# EAGLE board board comp2 2-27-12 (EAGLE 6.3)
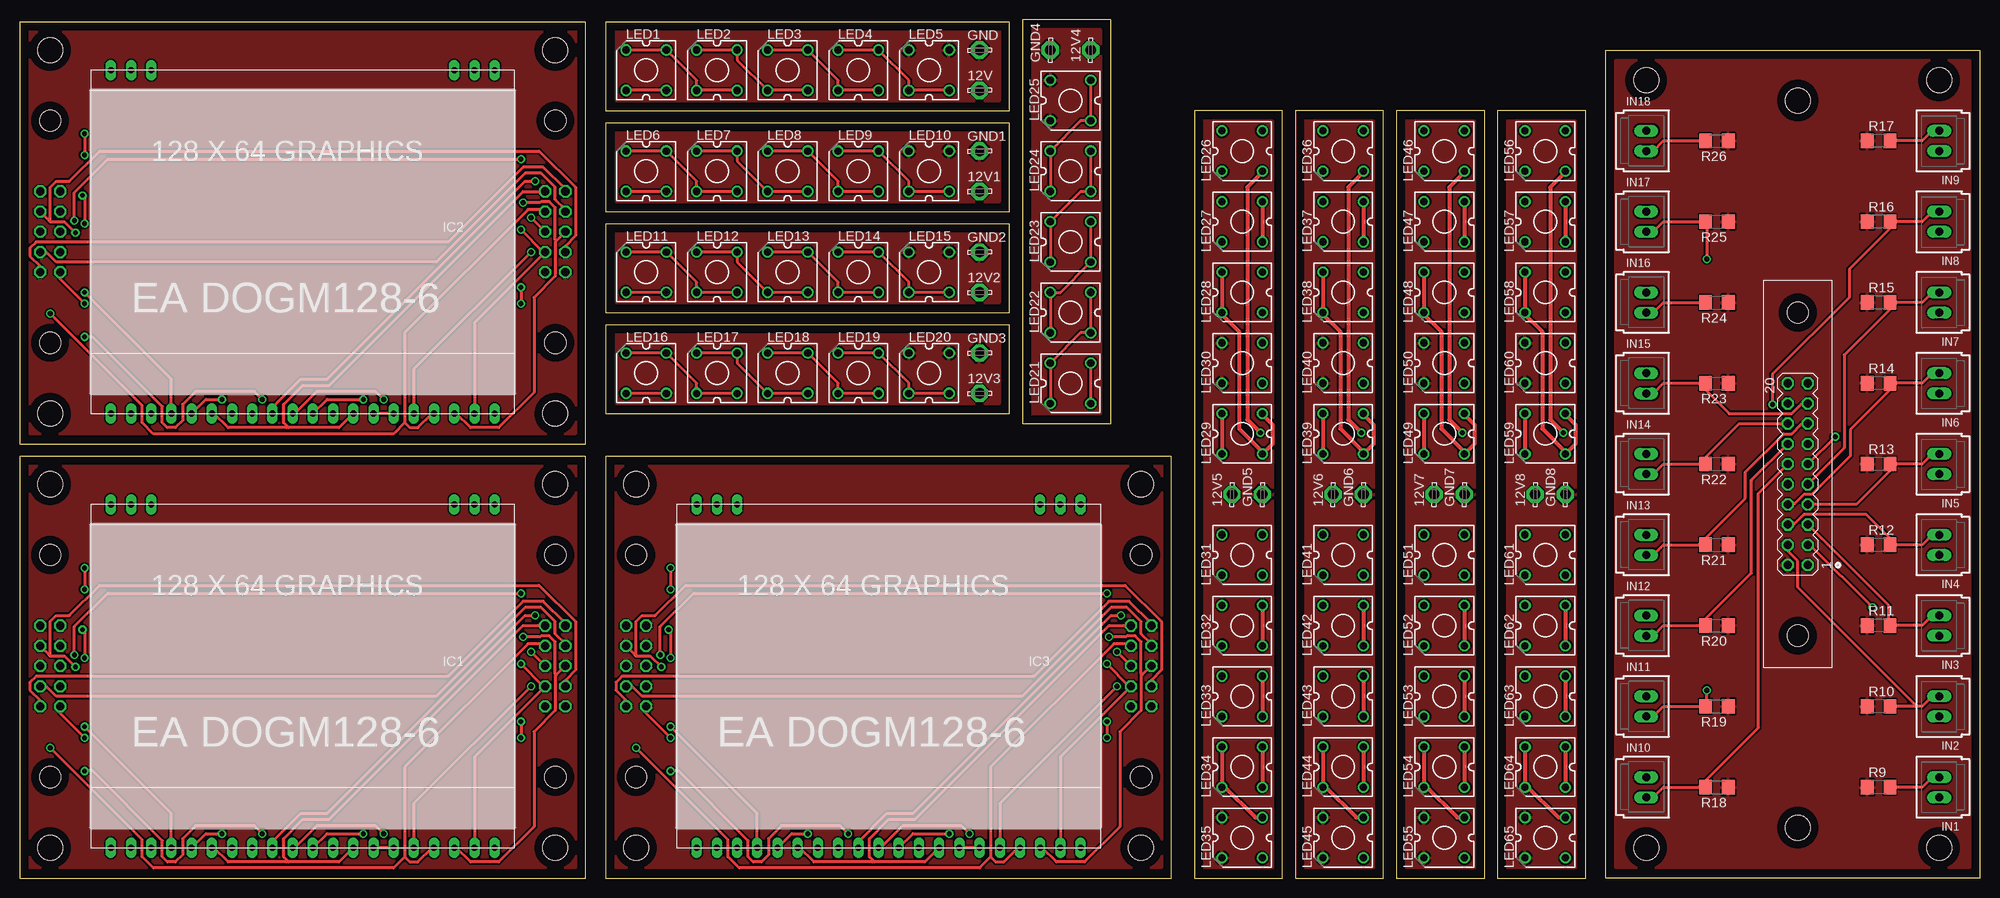
[diagram p0: board, top side]
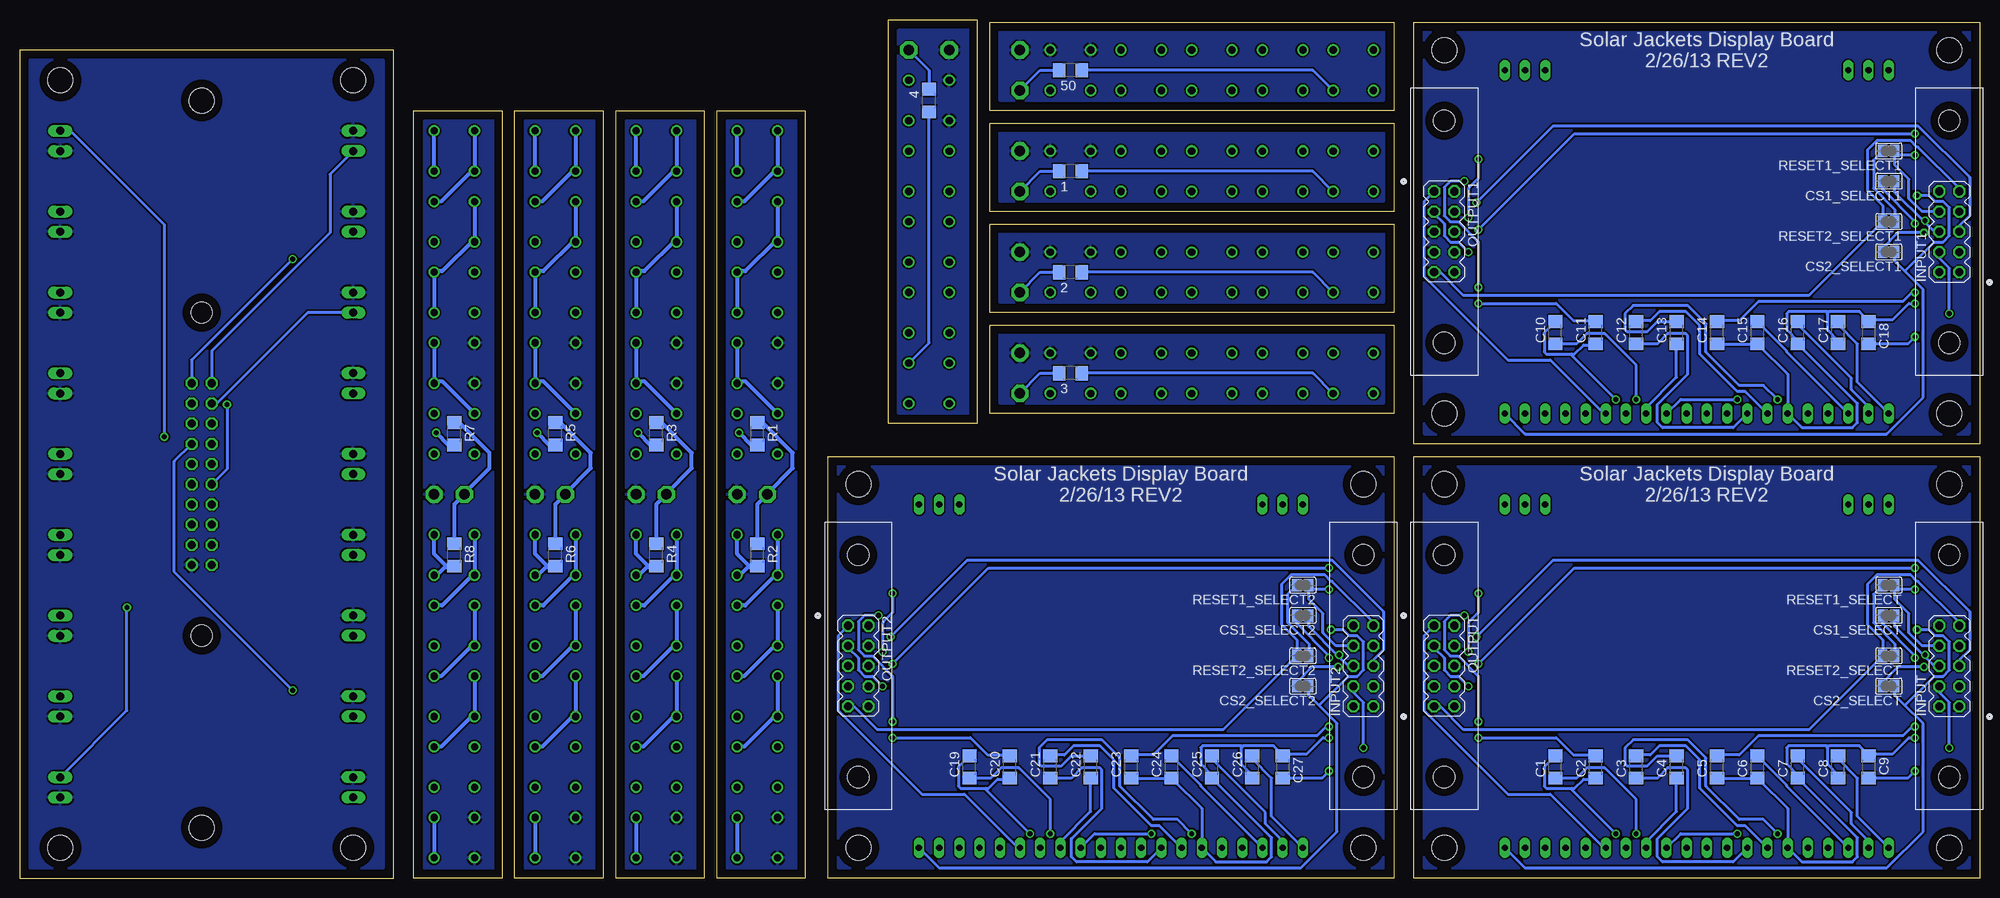
[diagram p1: board, bottom side, seen from below]

Size 246.38 x 107.93 mm. Coordinates in mm from the lower left corner, seen from the top.
Outline: 0,0 71.1,0 71.1,53.01 0,53.01 0,0
Outline: 0,54.61 71.1,54.61 71.1,107.62 0,107.62 0,54.61
Outline: 73.66,0 144.76,0 144.76,53.01 73.66,53.01 73.66,0
Outline: 73.66,96.52 124.44,96.52 124.44,107.62 73.66,107.62 73.66,96.52
Outline: 73.66,83.82 124.44,83.82 124.44,94.92 73.66,94.92 73.66,83.82
Outline: 73.66,71.12 124.44,71.12 124.44,82.22 73.66,82.22 73.66,71.12
Outline: 73.66,58.42 124.44,58.42 124.44,69.52 73.66,69.52 73.66,58.42
Outline: 137.16,57.15 137.16,107.93 126.06,107.93 126.06,57.15 137.16,57.15
Outline: 158.75,0 158.75,96.5 147.65,96.5 147.65,0 158.75,0
Outline: 171.45,0 171.45,96.5 160.35,96.5 160.35,0 171.45,0
Outline: 184.15,0 184.15,96.5 173.05,96.5 173.05,0 184.15,0
Outline: 196.85,0 196.85,96.5 185.75,96.5 185.75,0 196.85,0
Outline: 246.38,104.14 246.38,0 199.39,0 199.39,104.14 246.38,104.14
Copper layers (1*16): Top 0.035mm / dielectric 1.5mm / Bottom 0.035mm
Design rules "default": minimum track width 10mil, minimum drill 24mil, track to track 8mil, track to pad 8mil, pad to pad 8mil, via to via 8mil, smd to smd 8mil, copper to edge 40mil, drill to drill 8mil, minimum pad ring 10mil, minimum via ring 8mil, stop-mask expansion 4mil, vias tented up to drill 0mil, thermal gap 10mil
Holes 3.17 mm at 3.81,3.81 67.31,3.81 67.31,49.53 3.81,49.53 3.81,58.42 67.31,58.42 67.31,104.14 3.81,104.14 77.47,3.81 140.97,3.81 140.97,49.53 77.47,49.53 241.3,100.33 204.47,100.33 241.3,3.81 204.47,3.81 223.52,6.35 223.52,97.79
vRestrict: area 8.9,6.3 to 62.2,44.5; area 8.9,61 to 62.2,99.1; area 82.5,6.3 to 135.9,44.5

## Footprints (pad centres in the part's own frame; a part is rotated, then mirrored left to right if it is on the bottom)
R1206 = smd 1.6 x 1.803: 1 -1.422,0; 2 1.422,0
LSP13 = drill 1.321 pad 2.159 octagon: MP 0,0
C1206 = smd 1.6 x 1.8: 1 -1.4,0; 2 1.4,0
SJ = smd 1.168 x 1.6: 1 -0.762,0; 2 0.762,0
EADOGM128 = drill 0.8 long: 1 -25.4,-21.59; 2 -22.86,-21.59; 3 -20.32,-21.59; 18 17.78,-21.59; 19 20.32,-21.59; 20 22.86,-21.59; 21 22.86,21.59; 22 20.32,21.59; 23 17.78,21.59; 24 15.24,21.59; 25 12.7,21.59; 26 10.16,21.59; 27 7.62,21.59; 28 5.08,21.59; 29 2.54,21.59; 30 0,21.59; 31 -2.54,21.59; 32 -5.08,21.59; 33 -7.62,21.59; 34 -10.16,21.59; 35 -12.7,21.59; 36 -15.24,21.59; 37 -17.78,21.59; 38 -20.32,21.59; 39 -22.86,21.59; 40 -25.4,21.59
70543-02 = drill 1.016 long: 1 -1.27,0; 2 1.27,0
MA05-2 = drill 1.016 octagon: 1 -5.08,-1.27; 2 -5.08,1.27; 3 -2.54,-1.27; 4 -2.54,1.27; 5 0,-1.27; 6 0,1.27; 7 2.54,-1.27; 8 2.54,1.27; 9 5.08,-1.27; 10 5.08,1.27 | hole 2.692: -13.97,0; 13.97,0
CP41B = drill 0.9 pad 1.27: 1 -2.54,2.54; 2 -2.54,-2.54; 3 2.54,-2.54; 4 2.54,2.54
MA10-2 = drill 1.016 octagon: 1 -11.43,-1.27; 2 -11.43,1.27; 3 -8.89,-1.27; 4 -8.89,1.27; 5 -6.35,-1.27; 6 -6.35,1.27; 7 -3.81,-1.27; 8 -3.81,1.27; 9 -1.27,-1.27; 10 -1.27,1.27; 11 1.27,-1.27; 12 1.27,1.27; 13 3.81,-1.27; 14 3.81,1.27; 15 6.35,-1.27; 16 6.35,1.27; 17 8.89,-1.27; 18 8.89,1.27; 19 11.43,-1.27; 20 11.43,1.27 | hole 2.692: -20.32,0; 20.32,0

## Placement (x,y rotation side)
1  RESISTORSMD1206  [R1206]  114.3,88.9 0 bottom
2  RESISTORSMD1206  [R1206]  114.3,76.2 0 bottom
3  RESISTORSMD1206  [R1206]  114.3,63.5 0 bottom
4  RESISTORSMD1206  [R1206]  132.08,97.79 270 bottom
12V  LSP13  [LSP13]  120.65,99.06 0 top
12V1  LSP13  [LSP13]  120.65,86.36 0 top
12V2  LSP13  [LSP13]  120.65,73.66 0 top
12V3  LSP13  [LSP13]  120.65,60.96 0 top
12V4  LSP13  [LSP13]  134.62,104.14 90 top
12V5  LSP13  [LSP13]  152.4,48.26 90 top
12V6  LSP13  [LSP13]  165.1,48.26 90 top
12V7  LSP13  [LSP13]  177.8,48.26 90 top
12V8  LSP13  [LSP13]  190.5,48.26 90 top
50  RESISTORSMD1206  [R1206]  114.3,101.6 0 bottom
C1  1uF  [C1206]  53.34,13.97 90 bottom
C2  1uF  [C1206]  48.26,13.97 90 bottom
C3  1uF  [C1206]  43.18,13.97 90 bottom
C4  1uF  [C1206]  38.1,13.97 90 bottom
C5  1uF  [C1206]  33.02,13.97 90 bottom
C6  1uF  [C1206]  27.94,13.97 90 bottom
C7  1uF  [C1206]  22.86,13.97 90 bottom
C8  1uF  [C1206]  17.78,13.97 90 bottom
C9  1uF  [C1206]  13.97,13.97 270 bottom
C10  1uF  [C1206]  53.34,68.58 90 bottom
C11  1uF  [C1206]  48.26,68.58 90 bottom
C12  1uF  [C1206]  43.18,68.58 90 bottom
C13  1uF  [C1206]  38.1,68.58 90 bottom
C14  1uF  [C1206]  33.02,68.58 90 bottom
C15  1uF  [C1206]  27.94,68.58 90 bottom
C16  1uF  [C1206]  22.86,68.58 90 bottom
C17  1uF  [C1206]  17.78,68.58 90 bottom
C18  1uF  [C1206]  13.97,68.58 270 bottom
C19  1uF  [C1206]  127,13.97 90 bottom
C20  1uF  [C1206]  121.92,13.97 90 bottom
C21  1uF  [C1206]  116.84,13.97 90 bottom
C22  1uF  [C1206]  111.76,13.97 90 bottom
C23  1uF  [C1206]  106.68,13.97 90 bottom
C24  1uF  [C1206]  101.6,13.97 90 bottom
C25  1uF  [C1206]  96.52,13.97 90 bottom
C26  1uF  [C1206]  91.44,13.97 90 bottom
C27  1uF  [C1206]  87.63,13.97 270 bottom
CS1_SELECT  [SJ]  11.43,33.02 180 bottom
CS1_SELECT1  [SJ]  11.43,87.63 180 bottom
CS1_SELECT2  [SJ]  85.09,33.02 180 bottom
CS2_SELECT  [SJ]  11.43,24.13 180 bottom
CS2_SELECT1  [SJ]  11.43,78.74 180 bottom
CS2_SELECT2  [SJ]  85.09,24.13 180 bottom
GND  LSP13  [LSP13]  120.65,104.14 0 top
GND1  LSP13  [LSP13]  120.65,91.44 0 top
GND2  LSP13  [LSP13]  120.65,78.74 0 top
GND3  LSP13  [LSP13]  120.65,66.04 0 top
GND4  LSP13  [LSP13]  129.54,104.14 90 top
GND5  LSP13  [LSP13]  156.21,48.26 90 top
GND6  LSP13  [LSP13]  168.91,48.26 90 top
GND7  LSP13  [LSP13]  181.61,48.26 90 top
GND8  LSP13  [LSP13]  194.31,48.26 90 top
IC1  EADOGM128  [EADOGM128]  34.29,25.4 180 top
IC2  EADOGM128  [EADOGM128]  34.29,80.01 180 top
IC3  EADOGM128  [EADOGM128]  107.95,25.4 180 top
IN1  C-GRID-02-70543  [70543-02]  241.3,11.43 90 top
IN2  C-GRID-02-70543  [70543-02]  241.3,21.59 90 top
IN3  C-GRID-02-70543  [70543-02]  241.3,31.75 90 top
IN4  C-GRID-02-70543  [70543-02]  241.3,41.91 90 top
IN5  C-GRID-02-70543  [70543-02]  241.3,52.07 90 top
IN6  C-GRID-02-70543  [70543-02]  241.3,62.23 90 top
IN7  C-GRID-02-70543  [70543-02]  241.3,72.39 90 top
IN8  C-GRID-02-70543  [70543-02]  241.3,82.55 90 top
IN9  C-GRID-02-70543  [70543-02]  241.3,92.71 90 top
IN10  C-GRID-02-70543  [70543-02]  204.47,11.43 270 top
IN11  C-GRID-02-70543  [70543-02]  204.47,21.59 270 top
IN12  C-GRID-02-70543  [70543-02]  204.47,31.75 270 top
IN13  C-GRID-02-70543  [70543-02]  204.47,41.91 270 top
IN14  C-GRID-02-70543  [70543-02]  204.47,52.07 270 top
IN15  C-GRID-02-70543  [70543-02]  204.47,62.23 270 top
IN16  C-GRID-02-70543  [70543-02]  204.47,72.39 270 top
IN17  C-GRID-02-70543  [70543-02]  204.47,82.55 270 top
IN18  C-GRID-02-70543  [70543-02]  204.47,92.71 270 top
INPUT  AMP_LATCH_10  [MA05-2]  3.81,26.67 90 bottom
INPUT1  AMP_LATCH_10  [MA05-2]  3.81,81.28 90 bottom
INPUT2  AMP_LATCH_10  [MA05-2]  77.47,26.67 90 bottom
LED1  LED1  [CP41B]  78.74,101.6 0 top
LED2  LED2  [CP41B]  87.63,101.6 0 top
LED3  LED3  [CP41B]  96.52,101.6 0 top
LED4  LED4  [CP41B]  105.41,101.6 0 top
LED5  LED5  [CP41B]  114.3,101.6 0 top
LED6  LED1  [CP41B]  78.74,88.9 0 top
LED7  LED2  [CP41B]  87.63,88.9 0 top
LED8  LED3  [CP41B]  96.52,88.9 0 top
LED9  LED4  [CP41B]  105.41,88.9 0 top
LED10  LED5  [CP41B]  114.3,88.9 0 top
LED11  LED1  [CP41B]  78.74,76.2 0 top
LED12  LED2  [CP41B]  87.63,76.2 0 top
LED13  LED3  [CP41B]  96.52,76.2 0 top
LED14  LED4  [CP41B]  105.41,76.2 0 top
LED15  LED5  [CP41B]  114.3,76.2 0 top
LED16  LED1  [CP41B]  78.74,63.5 0 top
LED17  LED2  [CP41B]  87.63,63.5 0 top
LED18  LED3  [CP41B]  96.52,63.5 0 top
LED19  LED4  [CP41B]  105.41,63.5 0 top
LED20  LED5  [CP41B]  114.3,63.5 0 top
LED21  LED1  [CP41B]  132.08,62.23 90 top
LED22  LED2  [CP41B]  132.08,71.12 90 top
LED23  LED3  [CP41B]  132.08,80.01 90 top
LED24  LED4  [CP41B]  132.08,88.9 90 top
LED25  LED5  [CP41B]  132.08,97.79 90 top
LED26  LED1  [CP41B]  153.67,91.44 90 top
LED27  LED2  [CP41B]  153.67,82.55 90 top
LED28  LED3  [CP41B]  153.67,73.66 90 top
LED29  LED4  [CP41B]  153.67,55.88 90 top
LED30  LED5  [CP41B]  153.67,64.77 90 top
LED31  LED6  [CP41B]  153.67,40.64 90 top
LED32  LED7  [CP41B]  153.67,31.75 90 top
LED33  LED8  [CP41B]  153.67,22.86 90 top
LED34  LED9  [CP41B]  153.67,13.97 90 top
LED35  LED10  [CP41B]  153.67,5.08 90 top
LED36  LED1  [CP41B]  166.37,91.44 90 top
LED37  LED2  [CP41B]  166.37,82.55 90 top
LED38  LED3  [CP41B]  166.37,73.66 90 top
LED39  LED4  [CP41B]  166.37,55.88 90 top
LED40  LED5  [CP41B]  166.37,64.77 90 top
LED41  LED6  [CP41B]  166.37,40.64 90 top
LED42  LED7  [CP41B]  166.37,31.75 90 top
LED43  LED8  [CP41B]  166.37,22.86 90 top
LED44  LED9  [CP41B]  166.37,13.97 90 top
LED45  LED10  [CP41B]  166.37,5.08 90 top
LED46  LED1  [CP41B]  179.07,91.44 90 top
LED47  LED2  [CP41B]  179.07,82.55 90 top
LED48  LED3  [CP41B]  179.07,73.66 90 top
LED49  LED4  [CP41B]  179.07,55.88 90 top
LED50  LED5  [CP41B]  179.07,64.77 90 top
LED51  LED6  [CP41B]  179.07,40.64 90 top
LED52  LED7  [CP41B]  179.07,31.75 90 top
LED53  LED8  [CP41B]  179.07,22.86 90 top
LED54  LED9  [CP41B]  179.07,13.97 90 top
LED55  LED10  [CP41B]  179.07,5.08 90 top
LED56  LED1  [CP41B]  191.77,91.44 90 top
LED57  LED2  [CP41B]  191.77,82.55 90 top
LED58  LED3  [CP41B]  191.77,73.66 90 top
LED59  LED4  [CP41B]  191.77,55.88 90 top
LED60  LED5  [CP41B]  191.77,64.77 90 top
LED61  LED6  [CP41B]  191.77,40.64 90 top
LED62  LED7  [CP41B]  191.77,31.75 90 top
LED63  LED8  [CP41B]  191.77,22.86 90 top
LED64  LED9  [CP41B]  191.77,13.97 90 top
LED65  LED10  [CP41B]  191.77,5.08 90 top
OUTPUT  AMP_LATCH_10  [MA05-2]  67.31,26.67 270 bottom
OUTPUT1  AMP_LATCH_10  [MA05-2]  67.31,81.28 270 bottom
OUTPUT2  AMP_LATCH_10  [MA05-2]  140.97,26.67 270 bottom
R1  50  [R1206]  153.67,55.88 270 bottom
R2  50  [R1206]  153.67,40.64 270 bottom
R3  50  [R1206]  166.37,55.88 270 bottom
R4  50  [R1206]  166.37,40.64 270 bottom
R5  50  [R1206]  179.07,55.88 270 bottom
R6  50  [R1206]  179.07,40.64 270 bottom
R7  50  [R1206]  191.77,55.88 270 bottom
R8  50  [R1206]  191.77,40.64 270 bottom
R9  1K  [R1206]  233.68,11.43 0 top
R10  1K  [R1206]  233.68,21.59 0 top
R11  1K  [R1206]  233.68,31.75 0 top
R12  1K  [R1206]  233.68,41.91 0 top
R13  1K  [R1206]  233.68,52.07 0 top
R14  1K  [R1206]  233.68,62.23 0 top
R15  1K  [R1206]  233.68,72.39 0 top
R16  1K  [R1206]  233.68,82.55 0 top
R17  1K  [R1206]  233.68,92.71 0 top
R18  1K  [R1206]  213.36,11.43 180 top
R19  1K  [R1206]  213.36,21.59 180 top
R20  1K  [R1206]  213.36,31.75 180 top
R21  1K  [R1206]  213.36,41.91 180 top
R22  1K  [R1206]  213.36,52.07 180 top
R23  1K  [R1206]  213.36,62.23 180 top
R24  1K  [R1206]  213.36,72.39 180 top
R25  1K  [R1206]  213.36,82.55 180 top
R26  1K  [R1206]  213.36,92.71 180 top
RESET1_SELECT  [SJ]  11.43,36.83 180 bottom
RESET1_SELECT1  [SJ]  11.43,91.44 180 bottom
RESET1_SELECT2  [SJ]  85.09,36.83 180 bottom
RESET2_SELECT  [SJ]  11.43,27.94 180 bottom
RESET2_SELECT1  [SJ]  11.43,82.55 180 bottom
RESET2_SELECT2  [SJ]  85.09,27.94 180 bottom
U$1  AMP_LATCH-20  [MA10-2]  223.52,50.8 90 top

## Library data of the parts
1-4 50 = SolarJackets_Common
12V 12V1-12V8 GND GND1-GND8 = solpad
C1-C27 R1-R26 = rcl
CS1_SELECT CS1_SELECT1 CS1_SELECT2 CS2_SELECT CS2_SELECT1 CS2_SELECT2 RESET1_SELECT RESET1_SELECT1 RESET1_SELECT2 RESET2_SELECT RESET2_SELECT1 RESET2_SELECT2 = jumper
IC1-IC3 = ea-dogm
IN1-IN18 = con-molex; OC_FARNELL: unknown; OC_NEWARK: unknown
INPUT INPUT1 INPUT2 OUTPUT OUTPUT1 OUTPUT2 = SolarJackets_Common; PART_NUM: 5499922-1
LED1-LED65 = led
U$1 = SolarJackets_Common; PART_NUM: 5499160-1

## Nets
3.3V: IC1.34 IC1.35 INPUT.1 OUTPUT.1
3.3V1: IC2.34 IC2.35 INPUT1.1 OUTPUT1.1
3.3V2: IC3.34 IC3.35 INPUT2.1 OUTPUT2.1
3.3V3: IN1.1 IN2.1 IN3.1 IN4.1 IN5.1 IN6.1 IN7.1 IN8.1 IN9.1 IN10.1 IN11.1 IN12.1 IN13.1 IN14.1 IN15.1 IN16.1 IN17.1 IN18.1 U$1.1
A0: IC1.38 INPUT.5 OUTPUT.5
A1: IC2.38 INPUT1.5 OUTPUT1.5
A2: IC3.38 INPUT2.5 OUTPUT2.5
CS1: CS1_SELECT.1 INPUT.6 OUTPUT.6
CS2: CS2_SELECT.2 INPUT.7 OUTPUT.7
CS3: CS1_SELECT1.1 INPUT1.6 OUTPUT1.6
CS4: CS2_SELECT1.2 INPUT1.7 OUTPUT1.7
CS5: CS1_SELECT2.1 INPUT2.6 OUTPUT2.6
CS6: CS2_SELECT2.2 INPUT2.7 OUTPUT2.7
CS_SLCT: CS1_SELECT.2 CS2_SELECT.1 IC1.40
CS_SLCT1: CS1_SELECT1.2 CS2_SELECT1.1 IC2.40
CS_SLCT2: CS1_SELECT2.2 CS2_SELECT2.1 IC3.40
GND: C4.1 C5.1 C6.1 C7.1 C8.1 C9.1 IC1.26 IC1.33 INPUT.2 OUTPUT.2
GND1: C13.1 C14.1 C15.1 C16.1 C17.1 C18.1 IC2.26 IC2.33 INPUT1.2 OUTPUT1.2
GND2: C22.1 C23.1 C24.1 C25.1 C26.1 C27.1 IC3.26 IC3.33 INPUT2.2 OUTPUT2.2
GND3: GND.MP LED5.1 LED5.4
GND4: GND1.MP LED10.1 LED10.4
GND5: GND2.MP LED15.1 LED15.4
GND6: GND3.MP LED20.1 LED20.4
GND7: GND4.MP LED25.1 LED25.4
GND8: GND5.MP LED30.1 LED30.4 LED35.1 LED35.4
GND9: GND6.MP LED40.1 LED40.4 LED45.1 LED45.4
GND10: GND7.MP LED50.1 LED50.4 LED55.1 LED55.4
GND11: GND8.MP LED60.1 LED60.4 LED65.1 LED65.4
GND12: R9.1 R10.1 R11.1 R12.1 R13.1 R14.1 R15.1 R16.1 R17.1 R18.1 R19.1 R20.1 R21.1 R22.1 R23.1 R24.1 R25.1 R26.1 U$1.2
IN1: IN1.2 R9.2 U$1.3
IN2: IN2.2 R10.2 U$1.4
IN3: IN3.2 R11.2 U$1.5
IN4: IN4.2 R12.2 U$1.6
IN5: IN5.2 R13.2 U$1.7
IN6: IN6.2 R14.2 U$1.8
IN7: IN7.2 R15.2 U$1.9
IN8: IN8.2 R16.2 U$1.10
IN9: IN9.2 R17.2 U$1.11
IN10: IN10.2 R18.2 U$1.12
IN11: IN11.2 R19.2 U$1.13
IN12: IN12.2 R20.2 U$1.14
IN13: IN13.2 R21.2 U$1.15
IN14: IN14.2 R22.2 U$1.16
IN15: IN15.2 R23.2 U$1.17
IN16: IN16.2 R24.2 U$1.18
IN17: IN17.2 R25.2 U$1.19
IN18: IN18.2 R26.2 U$1.20
N$1: C1.2 C2.1 IC1.30
N$2: C1.1 IC1.31
N$3: C2.2 IC1.29
N$4: C3.2 IC1.27
N$5: C3.1 IC1.28
N$6: C9.2 IC1.32
N$7: C4.2 IC1.25
N$8: C5.2 IC1.24
N$9: C6.2 IC1.23
N$10: C7.2 IC1.22
N$11: C8.2 IC1.21
N$12: C10.2 C11.1 IC2.30
N$13: C10.1 IC2.31
N$14: C11.2 IC2.29
N$15: C12.2 IC2.27
N$16: C12.1 IC2.28
N$17: C13.2 IC2.25
N$18: C14.2 IC2.24
N$19: C15.2 IC2.23
N$20: C16.2 IC2.22
N$21: C17.2 IC2.21
N$22: C18.2 IC2.32
N$23: C19.2 C20.1 IC3.30
N$24: C19.1 IC3.31
N$25: C20.2 IC3.29
N$26: C21.2 IC3.27
N$27: C21.1 IC3.28
N$28: C22.2 IC3.25
N$29: C23.2 IC3.24
N$30: C24.2 IC3.23
N$31: C25.2 IC3.22
N$32: C26.2 IC3.21
N$33: C27.2 IC3.32
N$34: 50.2 LED1.2 LED1.3
N$35: LED1.1 LED1.4 LED2.2 LED2.3
N$36: LED2.1 LED2.4 LED3.2 LED3.3
N$37: LED3.1 LED3.4 LED4.2 LED4.3
N$38: LED4.1 LED4.4 LED5.2 LED5.3
N$39: 12V.MP 50.1
N$40: 1.2 LED6.2 LED6.3
N$41: LED6.1 LED6.4 LED7.2 LED7.3
N$42: LED7.1 LED7.4 LED8.2 LED8.3
N$43: LED8.1 LED8.4 LED9.2 LED9.3
N$44: LED9.1 LED9.4 LED10.2 LED10.3
N$45: 1.1 12V1.MP
N$46: 2.2 LED11.2 LED11.3
N$47: LED11.1 LED11.4 LED12.2 LED12.3
N$48: LED12.1 LED12.4 LED13.2 LED13.3
N$49: LED13.1 LED13.4 LED14.2 LED14.3
N$50: LED14.1 LED14.4 LED15.2 LED15.3
N$51: 2.1 12V2.MP
N$52: 3.2 LED16.2 LED16.3
N$53: LED16.1 LED16.4 LED17.2 LED17.3
N$54: LED17.1 LED17.4 LED18.2 LED18.3
N$55: LED18.1 LED18.4 LED19.2 LED19.3
N$56: LED19.1 LED19.4 LED20.2 LED20.3
N$57: 3.1 12V3.MP
N$58: 4.2 LED21.2 LED21.3
N$59: LED21.1 LED21.4 LED22.2 LED22.3
N$60: LED22.1 LED22.4 LED23.2 LED23.3
N$61: LED23.1 LED23.4 LED24.2 LED24.3
N$62: LED24.1 LED24.4 LED25.2 LED25.3
N$63: 4.1 12V4.MP
N$64: LED26.2 LED26.3 R1.2
N$65: LED26.1 LED26.4 LED27.2 LED27.3
N$66: LED27.1 LED27.4 LED28.2 LED28.3
N$67: LED28.1 LED28.4 LED29.2 LED29.3
N$68: LED29.1 LED29.4 LED30.2 LED30.3
N$69: 12V5.MP R1.1 R2.1
N$70: LED31.2 LED31.3 R2.2
N$71: LED31.1 LED31.4 LED32.2 LED32.3
N$72: LED32.1 LED32.4 LED33.2 LED33.3
N$73: LED33.1 LED33.4 LED34.2 LED34.3
N$74: LED34.1 LED34.4 LED35.2 LED35.3
N$75: LED36.2 LED36.3 R3.2
N$76: LED36.1 LED36.4 LED37.2 LED37.3
N$77: LED37.1 LED37.4 LED38.2 LED38.3
N$78: LED38.1 LED38.4 LED39.2 LED39.3
N$79: LED39.1 LED39.4 LED40.2 LED40.3
N$80: 12V6.MP R3.1 R4.1
N$81: LED41.2 LED41.3 R4.2
N$82: LED41.1 LED41.4 LED42.2 LED42.3
N$83: LED42.1 LED42.4 LED43.2 LED43.3
N$84: LED43.1 LED43.4 LED44.2 LED44.3
N$85: LED44.1 LED44.4 LED45.2 LED45.3
N$86: LED46.2 LED46.3 R5.2
N$87: LED46.1 LED46.4 LED47.2 LED47.3
N$88: LED47.1 LED47.4 LED48.2 LED48.3
N$89: LED48.1 LED48.4 LED49.2 LED49.3
N$90: LED49.1 LED49.4 LED50.2 LED50.3
N$91: 12V7.MP R5.1 R6.1
N$92: LED51.2 LED51.3 R6.2
N$93: LED51.1 LED51.4 LED52.2 LED52.3
N$94: LED52.1 LED52.4 LED53.2 LED53.3
N$95: LED53.1 LED53.4 LED54.2 LED54.3
N$96: LED54.1 LED54.4 LED55.2 LED55.3
N$97: LED56.2 LED56.3 R7.2
N$98: LED56.1 LED56.4 LED57.2 LED57.3
N$99: LED57.1 LED57.4 LED58.2 LED58.3
N$100: LED58.1 LED58.4 LED59.2 LED59.3
N$101: LED59.1 LED59.4 LED60.2 LED60.3
N$102: 12V8.MP R7.1 R8.1
N$103: LED61.2 LED61.3 R8.2
N$104: LED61.1 LED61.4 LED62.2 LED62.3
N$105: LED62.1 LED62.4 LED63.2 LED63.3
N$106: LED63.1 LED63.4 LED64.2 LED64.3
N$107: LED64.1 LED64.4 LED65.2 LED65.3
RESET1: IC1.39 INPUT.8 OUTPUT.8 RESET1_SELECT.1
RESET2: INPUT.9 OUTPUT.9 RESET2_SELECT.2
RESET3: IC2.39 INPUT1.8 OUTPUT1.8 RESET1_SELECT1.1
RESET4: INPUT1.9 OUTPUT1.9 RESET2_SELECT1.2
RESET5: IC3.39 INPUT2.8 OUTPUT2.8 RESET1_SELECT2.1
RESET6: INPUT2.9 OUTPUT2.9 RESET2_SELECT2.2
RESET_SLCT: RESET1_SELECT.2 RESET2_SELECT.1
RESET_SLCT1: RESET1_SELECT1.2 RESET2_SELECT1.1
RESET_SLCT2: RESET1_SELECT2.2 RESET2_SELECT2.1
SCL: IC1.37 INPUT.4 OUTPUT.4
SCL1: IC2.37 INPUT1.4 OUTPUT1.4
SCL2: IC3.37 INPUT2.4 OUTPUT2.4
SI: IC1.36 INPUT.3 OUTPUT.3
SI1: IC2.36 INPUT1.3 OUTPUT1.3
SI2: IC3.36 INPUT2.3 OUTPUT2.3

## Tracks (layer width: path | path; a pad name or v marks a point on that pad's centre or on a via)
3.3V
  Top 0.406: IC1.35 IC1.34 | INPUT.1 2.54,22.35 1.27,23.62 1.27,24.64 2.03,25.4 53.85,25.4 63.25,34.8 65.79,34.8 68.58,32 OUTPUT.1
  Bottom 0.406: IC1.35 47.24,3.81 53.98,10.54 59.31,10.54 69.85,21.08 69.85,30.48 OUTPUT.1
3.3V1
  Top 0.406: IC2.35 IC2.34 | INPUT1.1 2.54,76.96 1.27,78.23 1.27,79.25 2.03,80.01 53.85,80.01 63.25,89.41 65.79,89.41 68.58,86.61 OUTPUT1.1
  Bottom 0.406: IC2.35 47.24,58.42 53.98,65.15 59.31,65.15 69.85,75.69 69.85,85.09 OUTPUT1.1
3.3V2
  Top 0.406: IC3.35 IC3.34 | INPUT2.1 76.2,22.35 74.93,23.62 74.93,24.64 75.69,25.4 127.51,25.4 136.91,34.8 139.45,34.8 142.24,32 OUTPUT2.1
  Bottom 0.406: IC3.35 120.9,3.81 127.64,10.54 132.97,10.54 143.51,21.08 143.51,30.48 OUTPUT2.1
3.3V3
  pour Bottom: 245.11,1.27 200.66,1.27 200.66,102.87 245.11,102.87
A0  (via drill 0.61)
  Top 0.406: IC1.38 54.86,3.81 56.64,2.03 60.2,2.03 64.64,6.48 64.64,18.41 67.31,21.08 67.31,25.4 67.44,25.53 | OUTPUT.5 67.44,25.53 | v63.25,30.35 65.41,30.35 65.53,30.48 66.55,30.48 67.31,29.72 67.31,25.65 67.44,25.53
  Bottom 0.406: INPUT.5 2.54,27.43 1.27,28.7 1.27,33.53 7.75,40.01 53.59,40.01 v63.25,30.35
A1  (via drill 0.61)
  Top 0.406: IC2.38 54.86,58.42 56.64,56.64 60.2,56.64 64.64,61.09 64.64,73.03 67.31,75.69 67.31,80.01 67.44,80.14 | OUTPUT1.5 67.44,80.14 | v63.25,84.96 65.41,84.96 65.53,85.09 66.55,85.09 67.31,84.33 67.31,80.26 67.44,80.14
  Bottom 0.406: INPUT1.5 2.54,82.04 1.27,83.31 1.27,88.14 7.75,94.61 53.59,94.61 v63.25,84.96
A2  (via drill 0.61)
  Top 0.406: IC3.38 128.52,3.81 130.3,2.03 133.86,2.03 138.3,6.48 138.3,18.41 140.97,21.08 140.97,25.4 141.1,25.53 | OUTPUT2.5 141.1,25.53 | v136.91,30.35 139.06,30.35 139.19,30.48 140.21,30.48 140.97,29.72 140.97,25.65 141.1,25.53
  Bottom 0.406: INPUT2.5 76.2,27.43 74.93,28.7 74.93,33.53 81.41,40.01 127.25,40.01 v136.91,30.35
CS1  (via drill 0.61)
  Top 0.406: v64.26,28.45 OUTPUT.6 | v62.99,35.81 11.05,35.81 6.86,31.62 v6.86,28.07
  Bottom 0.406: CS1_SELECT.1 10.67,31.62 6.99,27.94 | 6.99,27.94 5.71,26.67 INPUT.6 | v64.26,28.45 64.26,32.13 62.99,33.4 v62.99,35.81 | v6.86,28.07 6.99,27.94
CS2  (via drill 0.61)
  Top 0.406: v6.99,26.54 5.59,27.94 3.81,27.94 3.68,28.07 | INPUT.7 3.68,28.07 | OUTPUT.7 68.58,24.89 69.85,26.16 69.85,32.26 65.28,36.83 10.03,36.83 6.22,33.02 4.57,33.02 3.81,32.26 3.81,28.19 3.68,28.07
  Bottom 0.406: CS2_SELECT.2 12.19,24.64 10.29,26.54 v6.99,26.54
CS3  (via drill 0.61)
  Top 0.406: v64.26,83.06 OUTPUT1.6 | v62.99,90.42 11.05,90.42 6.86,86.23 v6.86,82.68
  Bottom 0.406: CS1_SELECT1.1 10.67,86.23 6.99,82.55 | 6.99,82.55 5.71,81.28 INPUT1.6 | v64.26,83.06 64.26,86.74 62.99,88.01 v62.99,90.42 | v6.86,82.68 6.99,82.55
CS4  (via drill 0.61)
  Top 0.406: v6.99,81.15 5.59,82.55 3.81,82.55 3.68,82.68 | INPUT1.7 3.68,82.68 | OUTPUT1.7 68.58,79.5 69.85,80.77 69.85,86.87 65.28,91.44 10.03,91.44 6.22,87.63 4.57,87.63 3.81,86.87 3.81,82.8 3.68,82.68
  Bottom 0.406: CS2_SELECT1.2 12.19,79.25 10.29,81.15 v6.99,81.15
CS5  (via drill 0.61)
  Top 0.406: v137.92,28.45 OUTPUT2.6 | v136.65,35.81 84.71,35.81 80.52,31.62 v80.52,28.07
  Bottom 0.406: CS1_SELECT2.1 84.33,31.62 80.64,27.94 | 80.64,27.94 79.38,26.67 INPUT2.6 | v137.92,28.45 137.92,32.13 136.65,33.4 v136.65,35.81 | v80.52,28.07 80.64,27.94
CS6  (via drill 0.61)
  Top 0.406: v80.64,26.54 79.25,27.94 77.47,27.94 77.34,28.07 | INPUT2.7 77.34,28.07 | OUTPUT2.7 142.24,24.89 143.51,26.16 143.51,32.26 138.94,36.83 83.69,36.83 79.88,33.02 78.23,33.02 77.47,32.26 77.47,28.19 77.34,28.07
  Bottom 0.406: CS2_SELECT2.2 85.85,24.64 83.95,26.54 v80.64,26.54
CS_SLCT  (via drill 0.61)
  Top 0.406: v8.13,27.69 8.13,30.99 v7.87,31.24
  Bottom 0.406: CS2_SELECT.1 10.67,22.99 9.4,21.72 | 9.4,21.72 7.11,19.43 7.11,5.84 11.68,1.27 57.15,1.27 IC1.40 | CS1_SELECT.2 12.19,32 8.13,27.94 v8.13,27.69 | v7.87,31.24 6.35,31.24 5.59,30.48 4.57,30.48 3.81,29.72 3.81,26.16 4.57,25.4 5.71,25.4 9.4,21.72
CS_SLCT1  (via drill 0.61)
  Top 0.406: v8.13,82.3 8.13,85.6 v7.87,85.85
  Bottom 0.406: CS2_SELECT1.1 10.67,77.6 9.4,76.33 | 9.4,76.33 7.11,74.04 7.11,60.45 11.68,55.88 57.15,55.88 IC2.40 | CS1_SELECT1.2 12.19,86.61 8.13,82.55 v8.13,82.3 | v7.87,85.85 6.35,85.85 5.59,85.09 4.57,85.09 3.81,84.33 3.81,80.77 4.57,80.01 5.71,80.01 9.4,76.33
CS_SLCT2  (via drill 0.61)
  Top 0.406: v81.79,27.69 81.79,30.99 v81.53,31.24
  Bottom 0.406: CS2_SELECT2.1 84.33,22.99 83.06,21.72 | 83.06,21.72 80.77,19.43 80.77,5.84 85.34,1.27 130.81,1.27 IC3.40 | CS1_SELECT2.2 85.85,32 81.79,27.94 v81.79,27.69 | v81.53,31.24 80.01,31.24 79.25,30.48 78.23,30.48 77.47,29.72 77.47,26.16 78.23,25.4 79.38,25.4 83.06,21.72
GND  (via drill 0.61)
  Top 0.406: INPUT.2 5.08,20.7 v8.13,17.65 | OUTPUT.2 63.25,31.75 38.86,7.37 35.56,7.37 33.15,4.95 33.15,2.67 33.66,2.16 | 33.66,2.16 33.78,2.03 40.13,2.03 IC1.33 | IC1.26 24.38,3.81 26.16,2.03 33.53,2.03 33.66,2.16
  Bottom 0.406: C8.1 17.78,12.95 19.18,14.35 19.18,16.38 19.05,16.51 | 19.05,16.51 18.92,16.64 15.11,16.64 13.97,15.49 C9.1 13.84,15.62 10.92,15.62 8.89,17.65 v8.13,17.65 | 19.05,16.51 19.18,16.64 24,16.64 24.26,16.38 24.26,14.35 22.86,12.95 C7.1 22.73,12.45 15.37,5.08 15.37,2.67 16,2.03 22.35,2.03 IC1.26 24.13,8.76 27.81,12.45 C6.1 C5.1 | C4.1 38.1,8.38 41.91,4.57 IC1.33
GND1  (via drill 0.61)
  Top 0.406: INPUT1.2 5.08,75.31 v8.13,72.26 | OUTPUT1.2 63.25,86.36 38.86,61.98 35.56,61.98 33.15,59.56 33.15,57.28 33.66,56.77 | 33.66,56.77 33.78,56.64 40.13,56.64 IC2.33 | IC2.26 24.38,58.42 26.16,56.64 33.53,56.64 33.66,56.77
  Bottom 0.406: C17.1 17.78,67.56 19.18,68.96 19.18,70.99 19.05,71.12 | 19.05,71.12 18.92,71.25 15.11,71.25 13.97,70.1 C18.1 13.84,70.23 10.92,70.23 8.89,72.26 v8.13,72.26 | 19.05,71.12 19.18,71.25 24,71.25 24.26,70.99 24.26,68.96 22.86,67.56 C16.1 22.73,67.06 15.37,59.69 15.37,57.28 16,56.64 22.35,56.64 IC2.26 24.13,63.37 27.81,67.06 C15.1 C14.1 | C13.1 38.1,62.99 41.91,59.18 IC2.33
GND2  (via drill 0.61)
  Top 0.406: INPUT2.2 78.74,20.7 v81.79,17.65 | OUTPUT2.2 136.91,31.75 112.52,7.37 109.22,7.37 106.81,4.95 106.81,2.67 107.31,2.16 | 107.31,2.16 107.44,2.03 113.79,2.03 IC3.33 | IC3.26 98.04,3.81 99.82,2.03 107.19,2.03 107.31,2.16
  Bottom 0.406: C26.1 91.44,12.95 92.84,14.35 92.84,16.38 92.71,16.51 | 92.71,16.51 92.58,16.64 88.77,16.64 87.63,15.49 C27.1 87.5,15.62 84.58,15.62 82.55,17.65 v81.79,17.65 | 92.71,16.51 92.84,16.64 97.66,16.64 97.92,16.38 97.92,14.35 96.52,12.95 C25.1 96.39,12.45 89.03,5.08 89.03,2.67 89.66,2.03 96.01,2.03 IC3.26 97.79,8.76 101.47,12.45 C24.1 C23.1 | C22.1 111.76,8.38 115.57,4.57 IC3.33
GND3
  pour Bottom: 74.93,106.68 74.93,97.79 123.19,97.79 123.19,106.68
  pour Top: 74.93,106.68 74.93,97.79 123.19,97.79 123.19,106.68
GND4
  pour Bottom: 74.93,93.98 74.93,85.09 123.19,85.09 123.19,93.98
  pour Top: 74.93,93.98 74.93,85.09 123.19,85.09 123.19,93.98
GND5
  pour Bottom: 74.93,81.28 74.93,72.39 123.19,72.39 123.19,81.28
  pour Top: 74.93,81.28 74.93,72.39 123.19,72.39 123.19,81.28
GND6
  pour Bottom: 74.93,68.58 74.93,59.69 123.19,59.69 123.19,68.58
  pour Top: 74.93,68.58 74.93,59.69 123.19,59.69 123.19,68.58
GND7
  pour Bottom: 127,58.42 135.89,58.42 135.89,106.68 127,106.68
  pour Top: 127,58.42 135.89,58.42 135.89,106.68 127,106.68
GND8
  pour Top: 148.59,1.27 148.59,95.25 157.48,95.25 157.48,1.27
  pour Bottom: 148.59,1.27 148.59,95.25 157.48,95.25 157.48,1.27
GND9
  pour Top: 161.29,1.27 161.29,95.25 170.18,95.25 170.18,1.27
  pour Bottom: 161.29,1.27 161.29,95.25 170.18,95.25 170.18,1.27
GND10
  pour Top: 173.99,1.27 173.99,95.25 182.88,95.25 182.88,1.27
  pour Bottom: 173.99,1.27 173.99,95.25 182.88,95.25 182.88,1.27
GND11
  pour Top: 186.69,1.27 186.69,95.25 195.58,95.25 195.58,1.27
  pour Bottom: 186.69,1.27 186.69,95.25 195.58,95.25 195.58,1.27
GND12
  pour Top: 245.11,1.27 200.66,1.27 200.66,102.87 245.11,102.87
IN1  (via drill 0.61)
  Top 0.406: R9.2 239.14,11.43 240.41,12.7 IN1.2 | U$1.3 225.04,41.91 v232.92,34.04
  Bottom 0.406: v232.92,34.04 232.92,21.08 IN1.2
IN2
  Top 0.406: 238.38,21.59 239.14,21.59 240.41,22.86 IN2.2 | 238.38,21.59 R10.2 | U$1.4 222.25,41.15 223.52,39.88 223.52,36.58 238.38,21.72 238.38,21.59
IN3
  Top 0.406: IN3.2 240.41,33.02 239.14,31.75 R11.2 234.95,31.88 234.95,34.29 U$1.5
IN4
  Top 0.406: IN4.2 240.41,43.18 239.14,41.91 R12.2 235.84,42.04 232.16,45.72 224.28,45.72 223.01,44.45 U$1.6
IN5
  Top 0.406: IN5.2 240.41,53.34 239.14,52.07 R13.2 235.84,51.94 230.89,46.99 U$1.7
IN6
  Top 0.406: IN6.2 240.41,63.5 239.14,62.23 R14.2 235.84,62.1 230.12,56.39 230.12,53.09 225.3,48.26 224.28,48.26 223.01,46.99 U$1.8
IN7
  Top 0.406: IN7.2 240.41,73.66 239.14,72.39 R15.2 235.84,72.26 229.36,65.79 229.36,54.1 U$1.9
IN8  (via drill 0.61)
  Top 0.406: IN8.2 240.41,83.82 239.14,82.55 R16.2 235.84,82.42 230,76.58 230,73.03 220.34,63.37 v220.34,59.56
  Bottom 0.406: U$1.10 220.34,51.44 v220.34,59.56
IN9  (via drill 0.61)
  Top 0.406: R17.2 239.14,92.71 240.41,93.98 IN9.2 | v228.22,55.5 U$1.11
  Bottom 0.406: v228.22,55.5 228.22,82.17 240.03,93.98 IN9.2
IN10
  Top 0.406: IN10.2 205.36,10.16 206.63,11.43 R18.2 211.2,11.56 218.57,18.92 218.57,48.39 U$1.12
IN11  (via drill 0.61)
  Top 0.406: IN11.2 205.36,20.32 206.63,21.59 R19.2 212.09,21.72 v212.09,23.62
  Bottom 0.406: U$1.13 226.95,52.45 226.95,38.48 v212.09,23.62
IN12
  Top 0.406: IN12.2 205.36,30.48 206.63,31.75 R20.2 211.2,31.88 217.68,38.35 217.68,50.04 U$1.14
IN13
  Top 0.406: IN13.2 205.36,40.64 206.63,41.91 R21.2 211.2,42.04 216.92,47.75 216.92,51.05 221.74,55.88 222.76,55.88 224.03,57.15 U$1.15
IN14
  Top 0.406: IN14.2 205.36,50.8 206.63,52.07 R22.2 211.2,52.2 216.15,57.15 U$1.16
IN15
  Top 0.406: IN15.2 205.36,60.96 206.63,62.23 R23.2 211.2,62.1 214.88,58.42 222.76,58.42 224.03,59.69 U$1.17
IN16
  Top 0.406: R24.2 206.63,72.39 205.36,71.12 IN16.2
  Bottom 0.406: U$1.18 221.62,59.69 210.19,71.12 IN16.2
IN17  (via drill 0.61)
  Top 0.406: IN17.2 205.36,81.28 206.63,82.55 R25.2 212.09,82.42 v212.09,77.85
  Bottom 0.406: U$1.19 224.79,65.15 v212.09,77.85
IN18
  Top 0.406: R26.2 206.63,92.71 205.36,91.44 IN18.2
  Bottom 0.406: U$1.20 222.25,66.29 207.39,81.15 207.39,88.52 IN18.2
N$1  (via drill 0.61)
  Top 0.406: IC1.30 34.54,3.81 37.34,6.6 44.7,6.6 v45.72,5.59
  Bottom 0.406: 51.31,11.3 54.48,11.3 54.74,11.56 54.74,13.97 C1.2 | 51.31,11.3 50.93,11.3 49.78,12.45 48.26,12.45 C2.1 | v45.72,5.59 51.31,11.18 51.31,11.3
N$2  (via drill 0.61)
  Top 0.406: v43.18,5.59 38.61,5.59 IC1.31
  Bottom 0.406: v43.18,5.59 43.18,9.91 47.12,13.84 49.4,13.84 50.67,12.57 C1.1
N$3  (via drill 0.61)
  Top 0.406: v62.99,19.68 v62.99,17.65 | v64.77,33.02 63.5,33.02 38.61,8.13 35.31,8.13 31.75,4.57 IC1.29
  Bottom 0.406: v62.99,17.65 53.21,17.65 51.05,15.49 48.26,15.49 C2.2 | v62.99,19.68 62.99,25.4 65.53,27.94 66.55,27.94 67.31,28.7 67.31,32.26 66.55,33.02 v64.77,33.02
N$4
  Bottom 0.406: IC1.27 29.46,6.6 30.48,6.6 35.18,11.3 35.18,14.86 36.96,16.64 40.26,16.64 41.4,15.49 43.18,15.49 C3.2
N$5
  Bottom 0.406: IC1.28 30.99,2.03 39.88,2.03 40.51,2.67 40.51,4.95 36.7,8.76 36.7,13.59 36.96,13.84 39.24,13.84 40.51,12.57 C3.1
N$6  (via drill 0.61)
  Top 0.406: v8.13,13.46 9.14,13.46 17.91,4.7 17.91,2.67 18.54,2.03 19.56,2.03 20.45,2.92 20.45,4.95 22.1,6.6 29.46,6.6 v30.48,5.59
  Bottom 0.406: v8.13,13.46 9.02,12.57 C9.2 | v30.48,5.59 37.59,5.59 IC1.32
N$7  (via drill 0.61)
  Top 0.406: v25.4,5.59 23.37,5.59 IC1.25
  Bottom 0.406: v25.4,5.59 27.18,7.37 30.23,7.37 34.42,11.56 34.42,15.11 36.7,17.4 43.56,17.4 44.58,16.38 44.58,14.35 44.32,14.1 41.78,14.1 40.51,15.37 C4.2
N$8  (via drill 0.61)
  Top 0.406: v8.13,19.05 19.05,8.13 IC1.24
  Bottom 0.406: v8.13,19.05 8.51,19.05 9.65,17.91 27.81,17.91 30.23,15.49 33.02,15.49 C5.2
N$9
  Bottom 0.406: IC1.23 24.26,11.56 24.26,11.68 C6.2
N$10
  Bottom 0.406: C7.2 22.86,14.99 16.13,8.26 16.13,6.86 13.97,4.7 IC1.22
N$11
  Bottom 0.406: C8.2 17.78,14.99 15.37,12.57 15.37,7.75 IC1.21
N$12  (via drill 0.61)
  Top 0.406: IC2.30 34.54,58.42 37.34,61.21 44.7,61.21 v45.72,60.2
  Bottom 0.406: 51.31,65.91 54.48,65.91 54.74,66.17 54.74,68.58 C10.2 | 51.31,65.91 50.93,65.91 49.78,67.06 48.26,67.06 C11.1 | v45.72,60.2 51.31,65.79 51.31,65.91
N$13  (via drill 0.61)
  Top 0.406: v43.18,60.2 38.61,60.2 IC2.31
  Bottom 0.406: v43.18,60.2 43.18,64.52 47.12,68.45 49.4,68.45 50.67,67.18 C10.1
N$14  (via drill 0.61)
  Top 0.406: v62.99,74.3 v62.99,72.26 | v64.77,87.63 63.5,87.63 38.61,62.74 35.31,62.74 31.75,59.18 IC2.29
  Bottom 0.406: v62.99,72.26 53.21,72.26 51.05,70.1 48.26,70.1 C11.2 | v62.99,74.3 62.99,80.01 65.53,82.55 66.55,82.55 67.31,83.31 67.31,86.87 66.55,87.63 v64.77,87.63
N$15
  Bottom 0.406: IC2.27 29.46,61.21 30.48,61.21 35.18,65.91 35.18,69.47 36.96,71.25 40.26,71.25 41.4,70.1 43.18,70.1 C12.2
N$16
  Bottom 0.406: IC2.28 30.99,56.64 39.88,56.64 40.51,57.28 40.51,59.56 36.7,63.37 36.7,68.2 36.96,68.45 39.24,68.45 40.51,67.18 C12.1
N$17  (via drill 0.61)
  Top 0.406: v25.4,60.2 23.37,60.2 IC2.25
  Bottom 0.406: v25.4,60.2 27.18,61.98 30.23,61.98 34.42,66.17 34.42,69.72 36.7,72.01 43.56,72.01 44.58,70.99 44.58,68.96 44.32,68.71 41.78,68.71 40.51,69.98 C13.2
N$18  (via drill 0.61)
  Top 0.406: v8.13,73.66 19.05,62.74 IC2.24
  Bottom 0.406: v8.13,73.66 8.51,73.66 9.65,72.52 27.81,72.52 30.23,70.1 33.02,70.1 C14.2
N$19
  Bottom 0.406: IC2.23 24.26,66.17 24.26,66.29 C15.2
N$20
  Bottom 0.406: C16.2 22.86,69.6 16.13,62.87 16.13,61.47 13.97,59.31 IC2.22
N$21
  Bottom 0.406: C17.2 17.78,69.6 15.37,67.18 15.37,62.36 IC2.21
N$22  (via drill 0.61)
  Top 0.406: v8.13,68.07 9.14,68.07 17.91,59.31 17.91,57.28 18.54,56.64 19.56,56.64 20.45,57.53 20.45,59.56 22.1,61.21 29.46,61.21 v30.48,60.2
  Bottom 0.406: v8.13,68.07 9.02,67.18 C18.2 | v30.48,60.2 37.59,60.2 IC2.32
N$23  (via drill 0.61)
  Top 0.406: IC3.30 108.2,3.81 111,6.6 118.36,6.6 v119.38,5.59
  Bottom 0.406: 124.97,11.3 128.14,11.3 128.4,11.56 128.4,13.97 C19.2 | 124.97,11.3 124.59,11.3 123.44,12.45 121.92,12.45 C20.1 | v119.38,5.59 124.97,11.18 124.97,11.3
N$24  (via drill 0.61)
  Top 0.406: v116.84,5.59 112.27,5.59 IC3.31
  Bottom 0.406: v116.84,5.59 116.84,9.91 120.78,13.84 123.06,13.84 124.33,12.57 C19.1
N$25  (via drill 0.61)
  Top 0.406: v136.65,19.68 v136.65,17.65 | v138.43,33.02 137.16,33.02 112.27,8.13 108.97,8.13 105.41,4.57 IC3.29
  Bottom 0.406: v136.65,17.65 126.87,17.65 124.71,15.49 121.92,15.49 C20.2 | v136.65,19.68 136.65,25.4 139.19,27.94 140.21,27.94 140.97,28.7 140.97,32.26 140.21,33.02 v138.43,33.02
N$26
  Bottom 0.406: IC3.27 103.12,6.6 104.14,6.6 108.84,11.3 108.84,14.86 110.62,16.64 113.92,16.64 115.06,15.49 116.84,15.49 C21.2
N$27
  Bottom 0.406: IC3.28 104.65,2.03 113.54,2.03 114.17,2.67 114.17,4.95 110.36,8.76 110.36,13.59 110.62,13.84 112.9,13.84 114.17,12.57 C21.1
N$28  (via drill 0.61)
  Top 0.406: v99.06,5.59 97.03,5.59 IC3.25
  Bottom 0.406: v99.06,5.59 100.84,7.37 103.89,7.37 108.08,11.56 108.08,15.11 110.36,17.4 117.22,17.4 118.24,16.38 118.24,14.35 117.98,14.1 115.44,14.1 114.17,15.37 C22.2
N$29  (via drill 0.61)
  Top 0.406: v81.79,19.05 92.71,8.13 IC3.24
  Bottom 0.406: v81.79,19.05 82.17,19.05 83.31,17.91 101.47,17.91 103.89,15.49 106.68,15.49 C23.2
N$30
  Bottom 0.406: IC3.23 97.92,11.56 97.92,11.68 C24.2
N$31
  Bottom 0.406: C25.2 96.52,14.99 89.79,8.26 89.79,6.86 87.63,4.7 IC3.22
N$32
  Bottom 0.406: C26.2 91.44,14.99 89.03,12.57 89.03,7.75 IC3.21
N$33  (via drill 0.61)
  Top 0.406: v81.79,13.46 82.8,13.46 91.57,4.7 91.57,2.67 92.2,2.03 93.22,2.03 94.11,2.92 94.11,4.95 95.76,6.6 103.12,6.6 v104.14,5.59
  Bottom 0.406: v81.79,13.46 82.68,12.57 C27.2 | v104.14,5.59 111.25,5.59 IC3.32
N$34
  Top 0.406: LED1.3 LED1.2
  Bottom 0.406: 50.2 83.82,101.6 LED1.3
N$35
  Top 0.406: LED1.1 LED1.4 85.09,100.33 LED2.2 LED2.3
N$36
  Top 0.406: LED3.3 LED3.2 90.17,102.87 LED2.4 LED2.1
N$37
  Top 0.406: LED3.1 LED3.4 102.87,100.33 LED4.2 LED4.3
N$38
  Top 0.406: LED4.1 LED4.4 111.76,100.33 LED5.2 LED5.3
N$39
  Bottom 0.406: 50.1 118.11,101.6 12V.MP
N$40
  Top 0.406: LED6.3 LED6.2
  Bottom 0.406: 1.2 83.82,88.9 LED6.3
N$41
  Top 0.406: LED6.1 LED6.4 85.09,87.63 LED7.2 LED7.3
N$42
  Top 0.406: LED8.3 LED8.2 90.17,90.17 LED7.4 LED7.1
N$43
  Top 0.406: LED8.1 LED8.4 102.87,87.63 LED9.2 LED9.3
N$44
  Top 0.406: LED9.1 LED9.4 111.76,87.63 LED10.2 LED10.3
N$45
  Bottom 0.406: 1.1 118.11,88.9 12V1.MP
N$46
  Top 0.406: LED11.3 LED11.2
  Bottom 0.406: 2.2 83.82,76.2 LED11.3
N$47
  Top 0.406: LED11.1 LED11.4 85.09,74.93 LED12.2 LED12.3
N$48
  Top 0.406: LED13.3 LED13.2 90.17,77.47 LED12.4 LED12.1
N$49
  Top 0.406: LED13.1 LED13.4 102.87,74.93 LED14.2 LED14.3
N$50
  Top 0.406: LED14.1 LED14.4 111.76,74.93 LED15.2 LED15.3
N$51
  Bottom 0.406: 2.1 118.11,76.2 12V2.MP
N$52
  Top 0.406: LED16.3 LED16.2
  Bottom 0.406: 3.2 83.82,63.5 LED16.3
N$53
  Top 0.406: LED16.1 LED16.4 85.09,62.23 LED17.2 LED17.3
N$54
  Top 0.406: LED18.3 LED18.2 90.17,64.77 LED17.4 LED17.1
N$55
  Top 0.406: LED18.1 LED18.4 102.87,62.23 LED19.2 LED19.3
N$56
  Top 0.406: LED19.1 LED19.4 111.76,62.23 LED20.2 LED20.3
N$57
  Bottom 0.406: 3.1 118.11,63.5 12V3.MP
N$58
  Top 0.406: LED21.3 LED21.2
  Bottom 0.406: 4.2 132.08,67.31 LED21.3
N$59
  Top 0.406: LED21.1 LED21.4 133.35,68.58 LED22.2 LED22.3
N$60
  Top 0.406: LED23.3 LED23.2 130.81,73.66 LED22.4 LED22.1
N$61
  Top 0.406: LED23.1 LED23.4 133.35,86.36 LED24.2 LED24.3
N$62
  Top 0.406: LED24.1 LED24.4 133.35,95.25 LED25.2 LED25.3
N$63
  Bottom 0.406: 4.1 132.08,101.6 12V4.MP
N$64  (via drill 0.61)
  Top 0.508: v155.96,56.01 154.31,57.66 154.31,86.87 156.21,88.77 LED26.2
  Bottom 0.508: v155.96,56.01 154.43,54.48 153.67,54.48 R1.2 | LED26.2 LED26.3
N$65
  Top 0.508: LED27.3 LED27.2
  Bottom 0.508: LED26.4 LED26.1 151.26,89.15 155.32,85.09 LED27.3
N$66
  Bottom 0.508: LED28.2 LED28.3 156.08,76.33 155.19,76.33 151.26,80.26 LED27.1 LED27.4
N$67
  Top 0.508: LED29.3 156.21,58.29 157.48,57.02 157.48,54.61 LED29.2 156.21,53.59 153.29,56.52 153.29,68.71 151,70.99 LED28.1 LED28.4
N$68
  Top 0.508: LED29.4 LED29.1
  Bottom 0.508: LED30.3 LED30.2 156.08,62.48 155.19,62.48 LED29.4
N$69
  Bottom 0.508: R2.1 153.67,46.99 12V5.MP 152.4,48.39 149.22,51.56 149.22,53.47 153.03,57.28 153.67,57.28 R1.1
N$70
  Bottom 0.508: 154.69,39.12 154.81,39.12 155.83,38.1 LED31.2 | 154.69,39.12 153.67,39.12 R2.2 | LED31.3 156.21,40.77 154.69,39.24 154.69,39.12
N$71
  Top 0.508: LED32.3 LED32.2
  Bottom 0.508: LED31.4 LED31.1 151.26,38.23 155.19,34.29 LED32.3
N$72
  Top 0.508: LED33.3 LED33.2
  Bottom 0.508: LED32.4 LED32.1 151.26,29.46 155.32,25.4 LED33.3
N$73
  Top 0.508: LED34.3 LED34.2
  Bottom 0.508: LED33.4 LED33.1 151.26,20.57 155.32,16.51 LED34.3
N$74
  Top 0.508: LED34.4 LED34.1 151.26,11.68 155.32,7.62 LED35.3
  Bottom 0.508: LED35.3 LED35.2
N$75  (via drill 0.61)
  Top 0.508: v168.66,56.01 167,57.66 167,86.87 168.91,88.77 LED36.2
  Bottom 0.508: v168.66,56.01 167.13,54.48 166.37,54.48 R3.2 | LED36.2 LED36.3
N$76
  Top 0.508: LED37.3 LED37.2
  Bottom 0.508: LED36.4 LED36.1 163.96,89.15 168.02,85.09 LED37.3
N$77
  Bottom 0.508: LED38.2 LED38.3 168.78,76.33 167.89,76.33 163.96,80.26 LED37.1 LED37.4
N$78
  Top 0.508: LED39.3 168.91,58.29 170.18,57.02 170.18,54.61 LED39.2 168.91,53.59 165.99,56.52 165.99,68.71 163.7,70.99 LED38.1 LED38.4
N$79
  Top 0.508: LED39.4 LED39.1
  Bottom 0.508: LED40.3 LED40.2 168.78,62.48 167.89,62.48 LED39.4
N$80
  Bottom 0.508: R4.1 166.37,46.99 12V6.MP 165.1,48.39 161.93,51.56 161.93,53.47 165.74,57.28 166.37,57.28 R3.1
N$81
  Bottom 0.508: 167.39,39.12 167.51,39.12 168.53,38.1 LED41.2 | 167.39,39.12 166.37,39.12 R4.2 | LED41.3 168.91,40.77 167.39,39.24 167.39,39.12
N$82
  Top 0.508: LED42.3 LED42.2
  Bottom 0.508: LED41.4 LED41.1 163.96,38.23 167.89,34.29 LED42.3
N$83
  Top 0.508: LED43.3 LED43.2
  Bottom 0.508: LED42.4 LED42.1 163.96,29.46 168.02,25.4 LED43.3
N$84
  Top 0.508: LED44.3 LED44.2
  Bottom 0.508: LED43.4 LED43.1 163.96,20.57 168.02,16.51 LED44.3
N$85
  Top 0.508: LED44.4 LED44.1 163.96,11.68 168.02,7.62 LED45.3
  Bottom 0.508: LED45.3 LED45.2
N$86  (via drill 0.61)
  Top 0.508: v181.36,56.01 179.71,57.66 179.71,86.87 181.61,88.77 LED46.2
  Bottom 0.508: v181.36,56.01 179.83,54.48 179.07,54.48 R5.2 | LED46.2 LED46.3
N$87
  Top 0.508: LED47.3 LED47.2
  Bottom 0.508: LED46.4 LED46.1 176.66,89.15 180.72,85.09 LED47.3
N$88
  Bottom 0.508: LED48.2 LED48.3 181.48,76.33 180.59,76.33 176.66,80.26 LED47.1 LED47.4
N$89
  Top 0.508: LED49.3 181.61,58.29 182.88,57.02 182.88,54.61 LED49.2 181.61,53.59 178.69,56.52 178.69,68.71 176.4,70.99 LED48.1 LED48.4
N$90
  Top 0.508: LED49.4 LED49.1
  Bottom 0.508: LED50.3 LED50.2 181.48,62.48 180.59,62.48 LED49.4
N$91
  Bottom 0.508: R6.1 179.07,46.99 12V7.MP 177.8,48.39 174.62,51.56 174.62,53.47 178.44,57.28 179.07,57.28 R5.1
N$92
  Bottom 0.508: 180.09,39.12 180.21,39.12 181.23,38.1 LED51.2 | 180.09,39.12 179.07,39.12 R6.2 | LED51.3 181.61,40.77 180.09,39.24 180.09,39.12
N$93
  Top 0.508: LED52.3 LED52.2
  Bottom 0.508: LED51.4 LED51.1 176.66,38.23 180.59,34.29 LED52.3
N$94
  Top 0.508: LED53.3 LED53.2
  Bottom 0.508: LED52.4 LED52.1 176.66,29.46 180.72,25.4 LED53.3
N$95
  Top 0.508: LED54.3 LED54.2
  Bottom 0.508: LED53.4 LED53.1 176.66,20.57 180.72,16.51 LED54.3
N$96
  Top 0.508: LED54.4 LED54.1 176.66,11.68 180.72,7.62 LED55.3
  Bottom 0.508: LED55.3 LED55.2
N$97  (via drill 0.61)
  Top 0.508: v194.06,56.01 192.41,57.66 192.41,86.87 194.31,88.77 LED56.2
  Bottom 0.508: v194.06,56.01 192.53,54.48 191.77,54.48 R7.2 | LED56.2 LED56.3
N$98
  Top 0.508: LED57.3 LED57.2
  Bottom 0.508: LED56.4 LED56.1 189.36,89.15 193.42,85.09 LED57.3
N$99
  Bottom 0.508: LED58.2 LED58.3 194.18,76.33 193.29,76.33 189.36,80.26 LED57.1 LED57.4
N$100
  Top 0.508: LED59.3 194.31,58.29 195.58,57.02 195.58,54.61 LED59.2 194.31,53.59 191.39,56.52 191.39,68.71 189.1,70.99 LED58.1 LED58.4
N$101
  Top 0.508: LED59.4 LED59.1
  Bottom 0.508: LED60.3 LED60.2 194.18,62.48 193.29,62.48 LED59.4
N$102
  Bottom 0.508: R8.1 191.77,46.99 12V8.MP 190.5,48.39 187.32,51.56 187.32,53.47 191.13,57.28 191.77,57.28 R7.1
N$103
  Bottom 0.508: 192.79,39.12 192.91,39.12 193.93,38.1 LED61.2 | 192.79,39.12 191.77,39.12 R8.2 | LED61.3 194.31,40.77 192.79,39.24 192.79,39.12
N$104
  Top 0.508: LED62.3 LED62.2
  Bottom 0.508: LED61.4 LED61.1 189.36,38.23 193.29,34.29 LED62.3
N$105
  Top 0.508: LED63.3 LED63.2
  Bottom 0.508: LED62.4 LED62.1 189.36,29.46 193.42,25.4 LED63.3
N$106
  Top 0.508: LED64.3 LED64.2
  Bottom 0.508: LED63.4 LED63.1 189.36,20.57 193.42,16.51 LED64.3
N$107
  Top 0.508: LED64.4 LED64.1 189.36,11.68 193.42,7.62 LED65.3
  Bottom 0.508: LED65.3 LED65.2
RESET1  (via drill 0.61)
  Top 0.406: IC1.39 57.15,15.24 OUTPUT.8 65.79,24.13 v62.99,26.92 | v8.13,38.99 v8.13,36.32
  Bottom 0.406: INPUT.8 7.24,29.21 8.89,30.86 8.89,33.27 10.67,35.05 RESET1_SELECT.1 10.54,36.32 v8.13,36.32 | v8.13,38.99 50.93,38.99 v62.99,26.92
RESET2
  Bottom 0.406: INPUT.9 2.54,32.13 7.75,37.34 7.87,37.34 8.64,38.1 12.95,38.1 14.1,36.96 14.1,31.88 12.19,29.97 RESET2_SELECT.2 21.46,18.67 64.9,18.67 67.82,21.59 OUTPUT.9
RESET3  (via drill 0.61)
  Top 0.406: IC2.39 57.15,69.85 OUTPUT1.8 65.79,78.74 v62.99,81.53 | v8.13,93.6 v8.13,90.93
  Bottom 0.406: INPUT1.8 7.24,83.82 8.89,85.47 8.89,87.88 10.67,89.66 RESET1_SELECT1.1 10.54,90.93 v8.13,90.93 | v8.13,93.6 50.93,93.6 v62.99,81.53
RESET4
  Bottom 0.406: INPUT1.9 2.54,86.74 7.75,91.95 7.87,91.95 8.64,92.71 12.95,92.71 14.1,91.57 14.1,86.49 12.19,84.58 RESET2_SELECT1.2 21.46,73.28 64.9,73.28 67.82,76.2 OUTPUT1.9
RESET5  (via drill 0.61)
  Top 0.406: IC3.39 130.81,15.24 OUTPUT2.8 139.45,24.13 v136.65,26.92 | v81.79,38.99 v81.79,36.32
  Bottom 0.406: INPUT2.8 80.9,29.21 82.55,30.86 82.55,33.27 84.33,35.05 RESET1_SELECT2.1 84.2,36.32 v81.79,36.32 | v81.79,38.99 124.59,38.99 v136.65,26.92
RESET6
  Bottom 0.406: INPUT2.9 76.2,32.13 81.41,37.34 81.53,37.34 82.3,38.1 86.61,38.1 87.76,36.96 87.76,31.88 85.85,29.97 RESET2_SELECT2.2 95.12,18.67 138.56,18.67 141.48,21.59 OUTPUT2.9
RESET_SLCT
  Bottom 0.406: RESET2_SELECT.1 10.67,29.46 13.34,32.13 13.34,35.69 RESET1_SELECT.2
RESET_SLCT1
  Bottom 0.406: RESET2_SELECT1.1 10.67,84.07 13.34,86.74 13.34,90.3 RESET1_SELECT1.2
RESET_SLCT2
  Bottom 0.406: RESET2_SELECT2.1 84.33,29.46 87,32.13 87,35.69 RESET1_SELECT2.2
SCL  (via drill 0.61)
  Top 0.406: IC1.37 51.82,3.81 50.04,2.03 49.02,2.03 48.39,2.67 | 48.39,2.67 48.39,13.97 63.88,29.46 65.79,29.46 OUTPUT.4 | v3.81,16.38 15.37,4.83 15.37,2.67 16.76,1.27 46.99,1.27 48.39,2.67
  Bottom 0.406: INPUT.4 5.08,23.37 3.81,22.1 v3.81,16.38
SCL1  (via drill 0.61)
  Top 0.406: IC2.37 51.82,58.42 50.04,56.64 49.02,56.64 48.39,57.28 | 48.39,57.28 48.39,68.58 63.88,84.07 65.79,84.07 OUTPUT1.4 | v3.81,70.99 15.37,59.44 15.37,57.28 16.76,55.88 46.99,55.88 48.39,57.28
  Bottom 0.406: INPUT1.4 5.08,77.98 3.81,76.71 v3.81,70.99
SCL2  (via drill 0.61)
  Top 0.406: IC3.37 125.48,3.81 123.7,2.03 122.68,2.03 122.05,2.67 | 122.05,2.67 122.05,13.97 137.54,29.46 139.45,29.46 OUTPUT2.4 | v77.47,16.38 89.03,4.83 89.03,2.67 90.42,1.27 120.65,1.27 122.05,2.67
  Bottom 0.406: INPUT2.4 78.74,23.37 77.47,22.1 v77.47,16.38
SI  (via drill 0.61)
  Top 0.406: IC1.36 49.53,9.4 v64.26,24.13 | INPUT.3 3.3,24.13 4.57,22.86 52.32,22.86 63.5,34.04 65.53,34.04 67.31,32.26 67.31,30.73 68.58,29.46 OUTPUT.3
  Bottom 0.406: v64.26,24.13 65.53,25.4 66.55,25.4 67.31,26.16 67.31,27.69 68.58,28.96 OUTPUT.3
SI1  (via drill 0.61)
  Top 0.406: IC2.36 49.53,64.01 v64.26,78.74 | INPUT1.3 3.3,78.74 4.57,77.47 52.32,77.47 63.5,88.65 65.53,88.65 67.31,86.87 67.31,85.34 68.58,84.07 OUTPUT1.3
  Bottom 0.406: v64.26,78.74 65.53,80.01 66.55,80.01 67.31,80.77 67.31,82.3 68.58,83.57 OUTPUT1.3
SI2  (via drill 0.61)
  Top 0.406: IC3.36 123.19,9.4 v137.92,24.13 | INPUT2.3 76.96,24.13 78.23,22.86 125.98,22.86 137.16,34.04 139.19,34.04 140.97,32.26 140.97,30.73 142.24,29.46 OUTPUT2.3
  Bottom 0.406: v137.92,24.13 139.19,25.4 140.21,25.4 140.97,26.16 140.97,27.69 142.24,28.96 OUTPUT2.3
SIDE1
  pour Bottom: 1.27,52.07 69.85,52.07 69.85,1.27 1.27,1.27
  pour Top: 69.85,1.27 1.27,1.27 1.27,52.07 69.85,52.07
SIDE2
  pour Bottom: 1.27,106.68 69.85,106.68 69.85,55.88 1.27,55.88
  pour Top: 69.85,55.88 1.27,55.88 1.27,106.68 69.85,106.68
SIDE3
  pour Bottom: 74.93,52.07 143.51,52.07 143.51,1.27 74.93,1.27
  pour Top: 143.51,1.27 74.93,1.27 74.93,52.07 143.51,52.07

## Text on the board
bPlace: Solar Jackets Display Board / 2/26/13 REV2 | Solar Jackets Display Board / 2/26/13 REV2 | Solar Jackets Display Board / 2/26/13 REV2
tValues: SOLAR JACKETS / BUTTON BOARD / 2/27/13 REV 1 | 1: 3.3v / 2: GND / 3-20: IN1-18
bValues: Blinker REV 1 / 1-12-13 | Blinker REV 1 / 1-12-13 | Blinker REV 1 / 1-12-13 | Blinker REV 1 / 1-12-13 | PINOUTS / 1: 3.3V / 2: GND / 3: SI / 4: SCL / 5: A0 / 6: CS1 / 7: CS2 / 8: RESET1 / 9: RESET2 | Blinker REV 1 / 1-12-13 | Blinker REV 1 / 1-12-13 | Blinker REV 1 / 1-12-13 | Blinker REV 1 / 1-12-13 | Blinker REV 1 / 1-12-13 | Blinker REV 1 / 1-12-13 | PINOUTS / 1: 3.3V / 2: GND / 3: SI / 4: SCL / 5: A0 / 6: CS1 / 7: CS2 / 8: RESET1 / 9: RESET2 | PINOUTS / 1: 3.3V / 2: GND / 3: SI / 4: SCL / 5: A0 / 6: CS1 / 7: CS2 / 8: RESET1 / 9: RESET2